# EAGLE board Mp3_Trigger_Panel_v24 (EAGLE 7.4.0), part 1 of 4
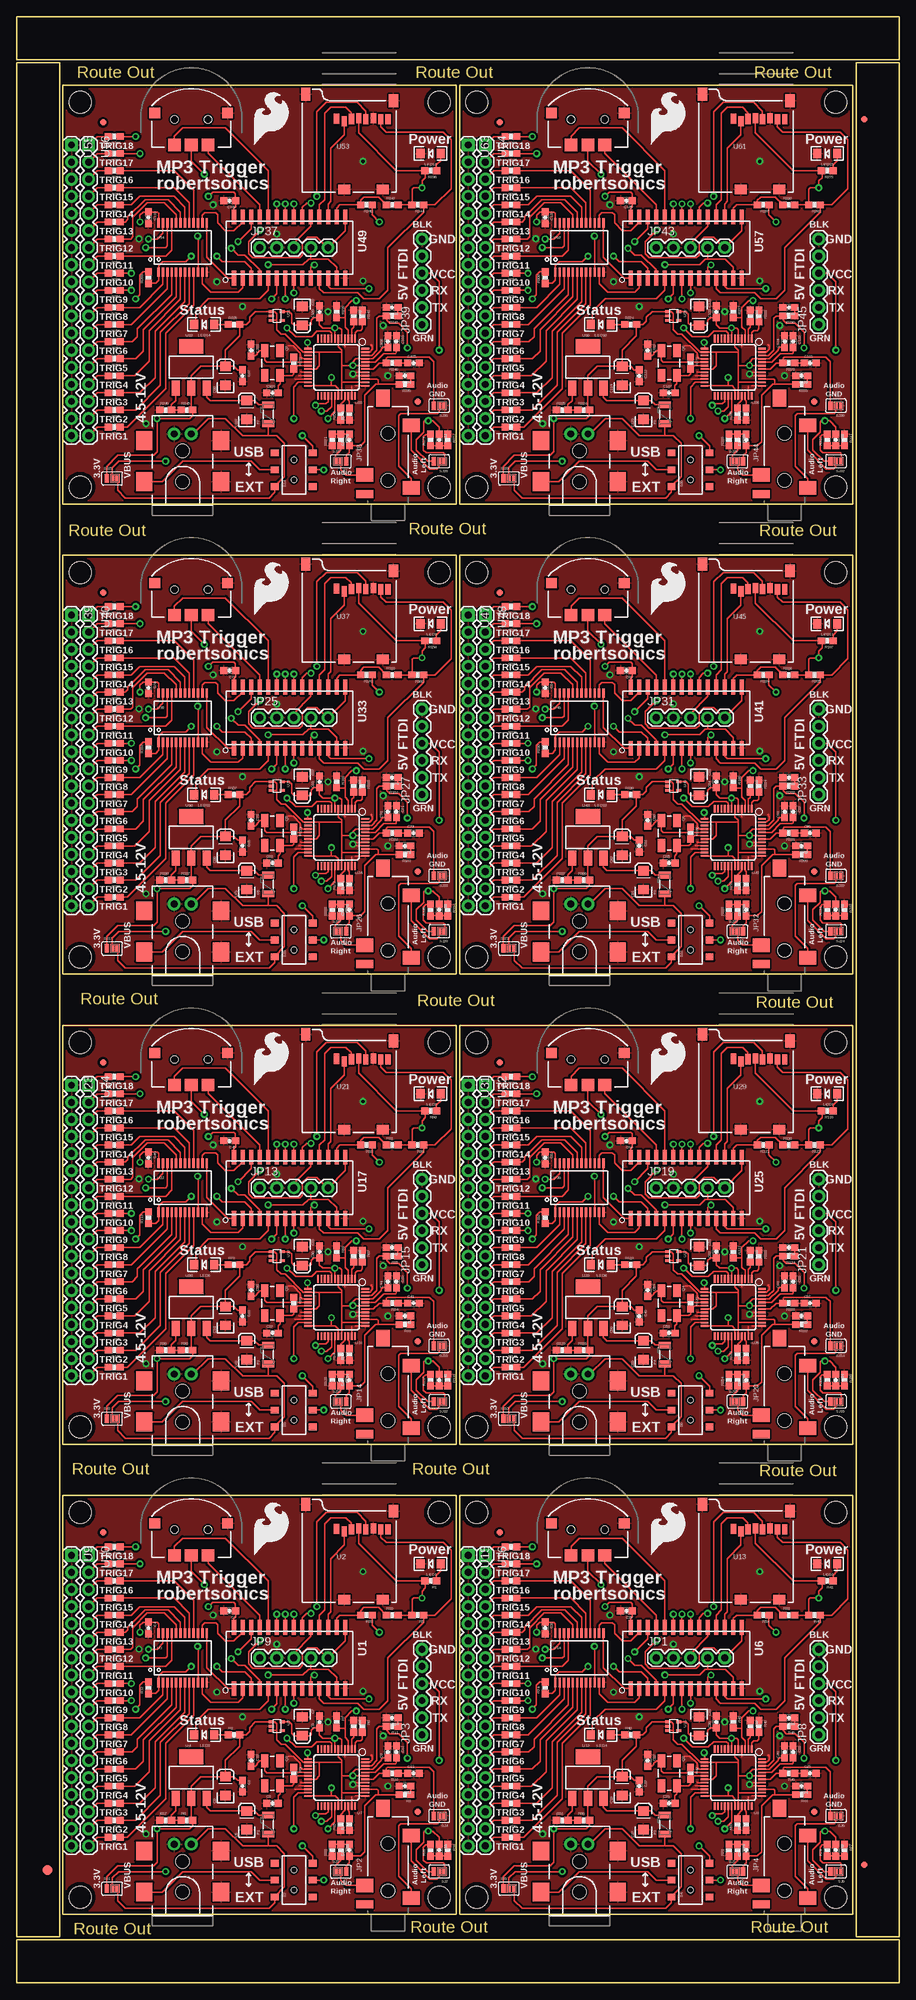
[diagram p0: board, top side]
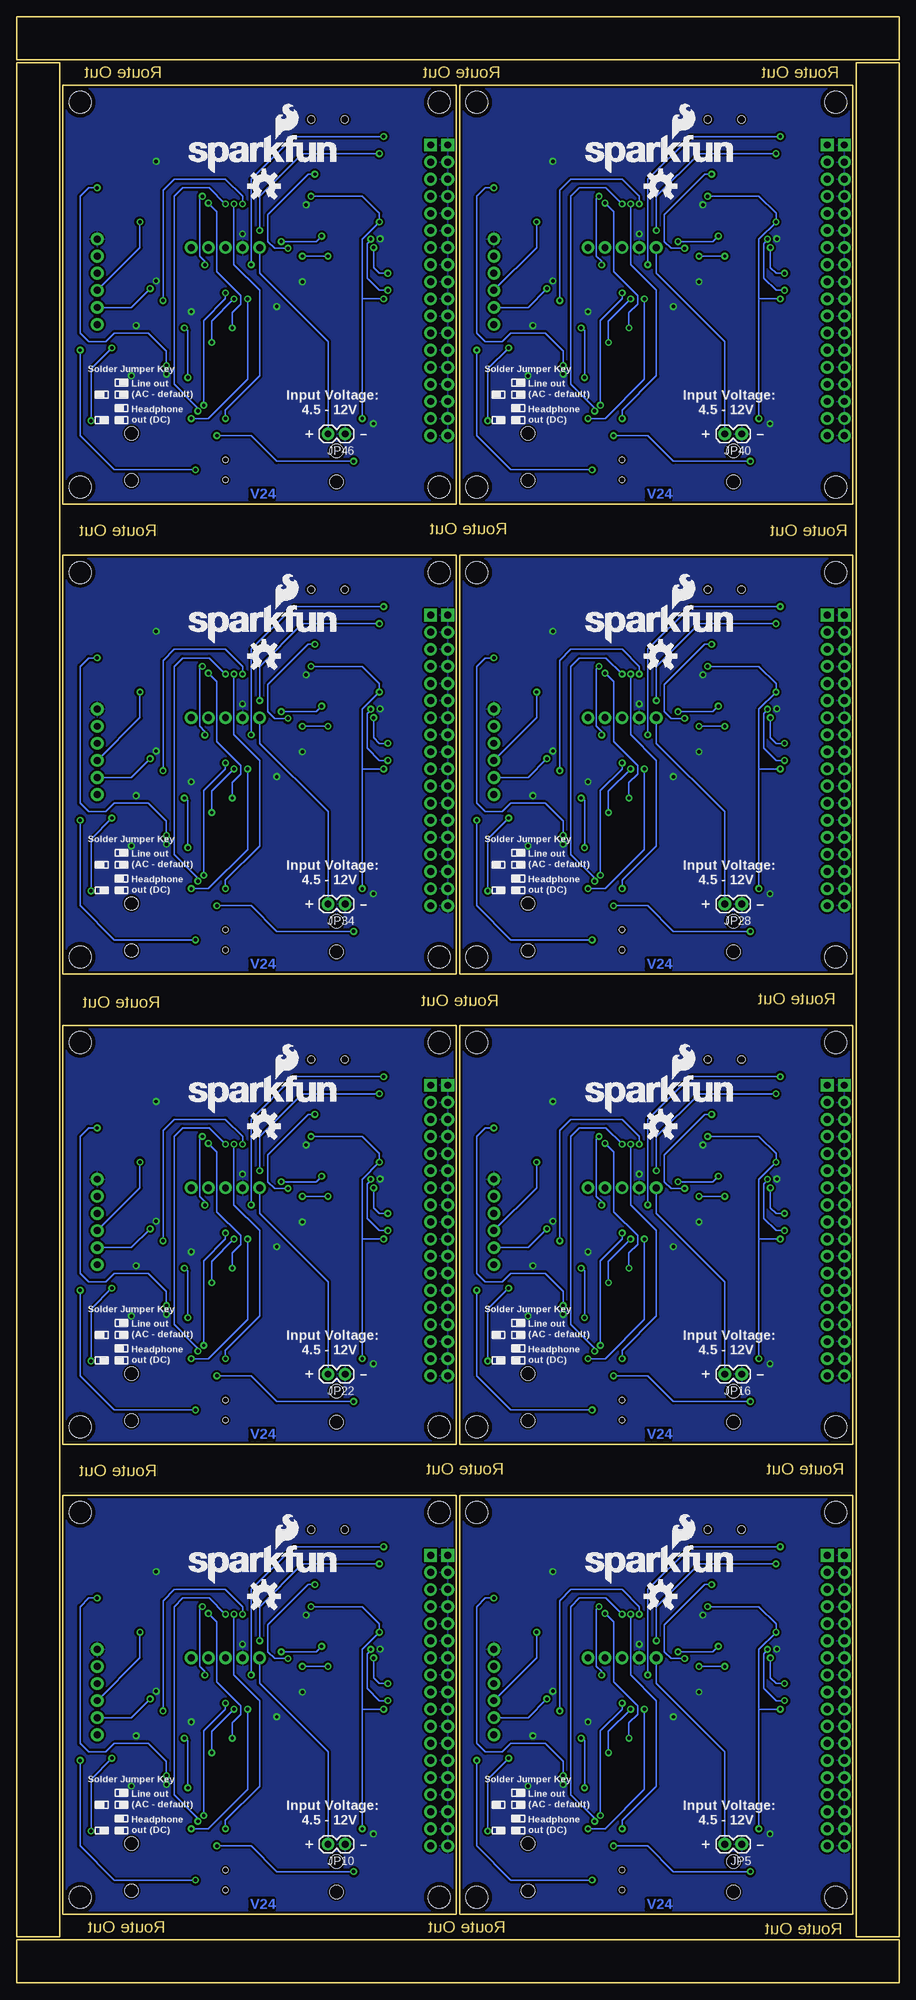
[diagram p1: board, bottom side, seen from below]

Size 131.06 x 292.1 mm. Coordinates in mm from the lower left corner, seen from the top.
Outline: 56 segments
Copper layers (1*16): Top 0.035mm / dielectric 1.5mm / Bottom 0.035mm
Design rules "SparkFun-2-layer": minimum track width 7mil, minimum drill 15mil, track to track 8mil, track to pad 8mil, pad to pad 8mil, via to via 8mil, smd to smd 8mil, copper to edge 8mil, drill to drill 8mil, minimum pad ring 12mil, minimum via ring 10mil, stop-mask expansion 4mil, vias tented up to drill 20mil, thermal gap 10mil
Net classes: 1 +5v: width 0.813 mm; 2 GND: width 0.813 mm

## Footprints (pad centres in the part's own frame; a part is rotated, then mirrored left to right if it is on the bottom)
0603-CAP = smd 1.1 x 1: 1 -0.85,0; 2 0.85,0
EIA3216 = smd 1.4 x 1.6: A 1.4,0; C -1.4,0
FIDUCIAL-1.5X3 = smd 1.5 x 1.5: 1 0,0
FIDUCIAL-1X2 = smd 1 x 1: 1 0,0
PTC-1206 = smd 1 x 1.8: 1 -1.4,0; 2 1.4,0
POWER_JACK_SMD_OVERPASTE_TOE = smd 2.8 x 2.4: GND 0,-5.7; P$4 6.1,-5.7; VIN0 0,5.7; VIN1 6.1,5.7 | hole 2.032: 0,0; 4.572,0
1X05 = drill 1.016 pad 1.88: 1 0,0; 2 2.54,0; 3 5.08,0; 4 7.62,0; 5 10.16,0
AUDIO-JACK-3.5MM-SMD = smd 2 x 2.5: RING 4.3,3.45; SLEEVE 2.4,-3.45; TIP 11.7,-3.45 | smd 1.2 x 2.5: RSH 1.5,3.45 | smd 2.5 x 2: TSH 15.75,0.75 | hole 2: 3.5,0; 10.5,0
1X06 = drill 1.016 pad 1.88: 1 0,0; 2 2.54,0; 3 5.08,0; 4 7.62,0; 5 10.16,0; 6 12.7,0
1X02 = drill 1.016 pad 1.88: 1 0,0; 2 2.54,0
LED-1206 = smd 1.2 x 1.4: A -1.5,0; C 1.5,0
CRYSTAL-SMD-5X3 = smd 1.9 x 1.1: 1 -1.85,-1.15; 2 1.85,-1.15; 3 1.85,1.15; 4 -1.85,1.15
0603-RES = smd 1.1 x 1: 1 -0.85,0; 2 0.85,0
NAV_SWITCH = smd 1.9 x 1.8: 1 -2.5,-3.8; 2 2.5,-3.8; T 0,-3.8 | smd 1.6 x 1.5: C 5.4,0.95; NC -5.4,0.95 | hole 1.1: -2.5,0; 2.5,0
AYZ0202 = smd 1 x 1.15: 1 -2.5,2.825; 2 0,2.825; 3 2.5,2.825; 4 -2.5,-2.825; 5 0,-2.825; 6 2.5,-2.825 | hole 0.85: 1.5,0; -1.5,0
PAD-JUMPER-3-2OF3_NC_BY_PASTE_YES_SILK_FULL_BOX = smd 0.635 x 1.27: 1 -0.813,0; 2 0,0; 3 0.813,0
PAD-HUMPER-3-1&2_NC_BY_PASTE_YES_SILK_FULL_BOX = smd 0.635 x 1.27: 1 -0.813,0; 2 0,0; 3 0.813,0
SOIC-28 = smd 0.6 x 2.2: 1 8.89,4.548; 2 7.62,4.548; 3 6.35,4.548; 4 5.08,4.548; 5 3.81,4.548; 6 2.54,4.548; 7 1.27,4.548; 8 0,4.548; 9 -1.27,4.548; 10 -2.54,4.548; 11 -3.81,4.548; 12 -5.08,4.548; 13 -6.35,4.548; 14 -7.62,4.548; 15 -7.62,-4.548; 16 -6.35,-4.548; 17 -5.08,-4.548; 18 -3.81,-4.548; 19 -2.54,-4.548; 20 -1.27,-4.548; 21 0,-4.548; 22 1.27,-4.548; 23 2.54,-4.548; 24 3.81,-4.548; 25 5.08,-4.548; 26 6.35,-4.548; 27 7.62,-4.548; 28 8.89,-4.548
MICROSD_1:1 = smd 0.8 x 1.5: 1 5.096,10.919; 2 6.218,10.519; 3 7.274,10.853; 4 8.367,10.982; 5 9.421,10.828; 6 10.539,10.973; 7 11.648,10.819; 8 12.721,10.819 | smd 1.8 x 1.4: CD1 11.92,0.4; CD2 6.22,0.4 | smd 1.4 x 1.9: GND1 0.497,14.55; GND3 13.52,13.55
SSOP24 = smd 0.348 x 1.397: 1 -3.575,-3.656; 2 -2.925,-3.656; 3 -2.275,-3.656; 4 -1.625,-3.656; 5 -0.975,-3.656; 6 -0.325,-3.656; 7 0.325,-3.656; 8 0.975,-3.656; 9 1.625,-3.656; 10 2.275,-3.656; 11 2.925,-3.656; 12 3.575,-3.656; 13 3.575,3.656; 14 2.925,3.656; 15 2.275,3.656; 16 1.625,3.656; 17 0.975,3.656; 18 0.325,3.656; 19 -0.325,3.656; 20 -0.975,3.656; 21 -1.625,3.656; 22 -2.275,3.656; 23 -2.925,3.656; 24 -3.575,3.656
SOT223 = smd 1.219 x 2.235: 1 -2.311,-3.099; 2 0,-3.099; 3 2.311,-3.099 | smd 3.6 x 2.2: 4 0,3.099
SC70 = smd 0.4 x 0.75: 1 -0.65,-0.825; 2 0,-0.825; 3 0.65,-0.825; 4 0.65,0.825; 5 -0.65,0.825
LQFP-48 = smd 0.254 x 1.143: 1 -2.75,-4.25; 2 -2.25,-4.25; 3 -1.75,-4.25; 4 -1.25,-4.25; 5 -0.75,-4.25; 6 -0.25,-4.25; 7 0.25,-4.25; 8 0.75,-4.25; 9 1.25,-4.25; 10 1.75,-4.25; 11 2.25,-4.25; 12 2.75,-4.25; 25 2.75,4.25; 26 2.25,4.25; 27 1.75,4.25; 28 1.25,4.25; 29 0.75,4.25; 30 0.25,4.25; 31 -0.25,4.25; 32 -0.75,4.25; 33 -1.25,4.25; 34 -1.75,4.25; 35 -2.25,4.25; 36 -2.75,4.25 | smd 1.143 x 0.254: 13 4.25,-2.75; 14 4.25,-2.25; 15 4.25,-1.75; 16 4.25,-1.25; 17 4.25,-0.75; 18 4.25,-0.25; 19 4.25,0.25; 20 4.25,0.75; 21 4.25,1.25; 22 4.25,1.75; 23 4.25,2.25; 24 4.25,2.75; 37 -4.25,2.75; 38 -4.25,2.25; 39 -4.25,1.75; 40 -4.25,1.25; 41 -4.25,0.75; 42 -4.25,0.25; 43 -4.25,-0.25; 44 -4.25,-0.75; 45 -4.25,-1.25; 46 -4.25,-1.75; 47 -4.25,-2.25; 48 -4.25,-2.75
1X18 = drill 1.016 pad 1.88 square: 1 0,0 | drill 1.016 pad 1.88: 2 2.54,0; 3 5.08,0; 4 7.62,0; 5 10.16,0; 6 12.7,0; 7 15.24,0; 8 17.78,0; 9 20.32,0; 10 22.86,0; 11 25.4,0; 12 27.94,0; 13 30.48,0; 14 33.02,0; 15 35.56,0; 16 38.1,0; 17 40.64,0; 18 43.18,0
STAND-OFF = hole 3.302: 0,0

## Placement (x,y rotation side)
C1  0.1uF  [0603-CAP]  31.62,55.24 180 top
C2  0.1uF  [0603-CAP]  33.53,29.21 270 top
C3  10uF  [EIA3216]  30.99,29.21 90 top
C4  0.1uF  [0603-CAP]  19.56,52.7 270 top
C5  10uF  [EIA3216]  34.16,24.13 90 top
C6  0.1uF  [0603-CAP]  55.12,34.29 90 top
C7  10uF  [EIA3216]  42.42,38.1 270 top
C8  0.1uF  [0603-CAP]  44.96,38.73 90 top
C9  22pF  [0603-CAP]  37.97,26.67 0 top
C10  22pF  [0603-CAP]  34.8,33.02 270 top
C11  0.1uF  [0603-CAP]  56.39,34.29 270 top
C12  10nF  [0603-CAP]  57.66,29.21 180 top
C13  47nF  [0603-CAP]  58.93,31.11 0 top
C14  10nF  [0603-CAP]  55.75,39.37 180 top
C15  10uF  [0603-CAP]  49.4,19.68 90 top
C16  10uF  [0603-CAP]  62.74,19.68 270 top
C17  0.1uF  [0603-CAP]  92.46,29.21 270 top
C18  10uF  [EIA3216]  89.92,29.21 90 top
C19  10uF  [EIA3216]  101.35,38.1 270 top
C20  0.1uF  [0603-CAP]  103.89,38.73 90 top
C21  22pF  [0603-CAP]  96.9,26.67 0 top
C22  22pF  [0603-CAP]  93.73,33.02 270 top
C23  0.1uF  [0603-CAP]  115.32,34.29 270 top
C24  10nF  [0603-CAP]  116.59,29.21 180 top
C25  47nF  [0603-CAP]  117.86,31.11 0 top
C26  10nF  [0603-CAP]  114.68,39.37 180 top
C27  10uF  [EIA3216]  93.09,24.13 90 top
C28  0.1uF  [0603-CAP]  114.05,34.29 90 top
C29  0.1uF  [0603-CAP]  90.55,55.24 180 top
C30  0.1uF  [0603-CAP]  78.49,52.7 270 top
C31  10uF  [0603-CAP]  108.33,19.68 90 top
C32  10uF  [0603-CAP]  121.67,19.68 270 top
C33  0.1uF  [0603-CAP]  33.53,99.06 270 top
C34  10uF  [EIA3216]  30.99,99.06 90 top
C35  10uF  [EIA3216]  42.42,107.95 270 top
C36  0.1uF  [0603-CAP]  44.96,108.58 90 top
C37  22pF  [0603-CAP]  37.97,96.52 0 top
C38  22pF  [0603-CAP]  34.8,102.87 270 top
C39  0.1uF  [0603-CAP]  56.39,104.14 270 top
C40  10nF  [0603-CAP]  57.66,99.06 180 top
C41  47nF  [0603-CAP]  58.93,100.97 0 top
C42  10nF  [0603-CAP]  55.75,109.22 180 top
C43  10uF  [EIA3216]  34.16,93.98 90 top
C44  0.1uF  [0603-CAP]  55.12,104.14 90 top
C45  0.1uF  [0603-CAP]  31.62,125.09 180 top
C46  0.1uF  [0603-CAP]  19.56,122.56 270 top
C47  10uF  [0603-CAP]  49.4,89.53 90 top
C48  10uF  [0603-CAP]  62.74,89.53 270 top
C49  0.1uF  [0603-CAP]  92.46,99.06 270 top
C50  10uF  [EIA3216]  89.92,99.06 90 top
C51  10uF  [EIA3216]  101.35,107.95 270 top
C52  0.1uF  [0603-CAP]  103.89,108.58 90 top
C53  22pF  [0603-CAP]  96.9,96.52 0 top
C54  22pF  [0603-CAP]  93.73,102.87 270 top
C55  0.1uF  [0603-CAP]  115.32,104.14 270 top
C56  10nF  [0603-CAP]  116.59,99.06 180 top
C57  47nF  [0603-CAP]  117.86,100.97 0 top
C58  10nF  [0603-CAP]  114.68,109.22 180 top
C59  10uF  [EIA3216]  93.09,93.98 90 top
C60  0.1uF  [0603-CAP]  114.05,104.14 90 top
C61  0.1uF  [0603-CAP]  90.55,125.09 180 top
C62  0.1uF  [0603-CAP]  78.49,122.56 270 top
C63  10uF  [0603-CAP]  108.33,89.53 90 top
C64  10uF  [0603-CAP]  121.67,89.53 270 top
C65  0.1uF  [0603-CAP]  33.53,168.91 270 top
C66  10uF  [EIA3216]  30.99,168.91 90 top
C67  10uF  [EIA3216]  42.42,177.8 270 top
C68  0.1uF  [0603-CAP]  44.96,178.44 90 top
C69  22pF  [0603-CAP]  37.97,166.37 0 top
C70  22pF  [0603-CAP]  34.8,172.72 270 top
C71  0.1uF  [0603-CAP]  56.39,173.99 270 top
C72  10nF  [0603-CAP]  57.66,168.91 180 top
C73  47nF  [0603-CAP]  58.93,170.81 0 top
C74  10nF  [0603-CAP]  55.75,179.07 180 top
C75  10uF  [EIA3216]  34.16,163.83 90 top
C76  0.1uF  [0603-CAP]  55.12,173.99 90 top
C77  0.1uF  [0603-CAP]  31.62,194.94 180 top
C78  0.1uF  [0603-CAP]  19.56,192.41 270 top
C79  10uF  [0603-CAP]  49.4,159.38 90 top
C80  10uF  [0603-CAP]  62.74,159.38 270 top
C81  0.1uF  [0603-CAP]  92.46,168.91 270 top
C82  10uF  [EIA3216]  89.92,168.91 90 top
C83  10uF  [EIA3216]  101.35,177.8 270 top
C84  0.1uF  [0603-CAP]  103.89,178.44 90 top
C85  22pF  [0603-CAP]  96.9,166.37 0 top
C86  22pF  [0603-CAP]  93.73,172.72 270 top
C87  0.1uF  [0603-CAP]  115.32,173.99 270 top
C88  10nF  [0603-CAP]  116.59,168.91 180 top
C89  47nF  [0603-CAP]  117.86,170.81 0 top
C90  10nF  [0603-CAP]  114.68,179.07 180 top
C91  10uF  [EIA3216]  93.09,163.83 90 top
C92  0.1uF  [0603-CAP]  114.05,173.99 90 top
C93  0.1uF  [0603-CAP]  90.55,194.94 180 top
C94  0.1uF  [0603-CAP]  78.49,192.41 270 top
C95  10uF  [0603-CAP]  108.33,159.38 90 top
C96  10uF  [0603-CAP]  121.67,159.38 270 top
C97  0.1uF  [0603-CAP]  33.53,238.76 270 top
C98  10uF  [EIA3216]  30.99,238.76 90 top
C99  10uF  [EIA3216]  42.42,247.65 270 top
C100  0.1uF  [0603-CAP]  44.96,248.28 90 top
C101  22pF  [0603-CAP]  37.97,236.22 0 top
C102  22pF  [0603-CAP]  34.8,242.57 270 top
C103  0.1uF  [0603-CAP]  56.39,243.84 270 top
C104  10nF  [0603-CAP]  57.66,238.76 180 top
C105  47nF  [0603-CAP]  58.93,240.66 0 top
C106  10nF  [0603-CAP]  55.75,248.92 180 top
C107  10uF  [EIA3216]  34.16,233.68 90 top
C108  0.1uF  [0603-CAP]  55.12,243.84 90 top
C109  0.1uF  [0603-CAP]  31.62,264.8 180 top
C110  0.1uF  [0603-CAP]  19.56,262.25 270 top
C111  10uF  [0603-CAP]  49.4,229.24 90 top
C112  10uF  [0603-CAP]  62.74,229.24 270 top
C113  0.1uF  [0603-CAP]  92.46,238.76 270 top
C114  10uF  [EIA3216]  89.92,238.76 90 top
C115  10uF  [EIA3216]  101.35,247.65 270 top
C116  0.1uF  [0603-CAP]  103.89,248.28 90 top
C117  22pF  [0603-CAP]  96.9,236.22 0 top
C118  22pF  [0603-CAP]  93.73,242.57 270 top
C119  0.1uF  [0603-CAP]  115.32,243.84 270 top
C120  10nF  [0603-CAP]  116.59,238.76 180 top
C121  47nF  [0603-CAP]  117.86,240.66 0 top
C122  10nF  [0603-CAP]  114.68,248.92 180 top
C123  10uF  [EIA3216]  93.09,233.68 90 top
C124  0.1uF  [0603-CAP]  114.05,243.84 90 top
C125  0.1uF  [0603-CAP]  90.55,264.8 180 top
C126  0.1uF  [0603-CAP]  78.49,262.25 270 top
C127  10uF  [0603-CAP]  108.33,229.24 90 top
C128  10uF  [0603-CAP]  121.67,229.24 270 top
E$1  [FIDUCIAL-1.5X3]  4.57,16.76 0 top
E$5  [FIDUCIAL-1X2]  125.86,17.53 0 top
E$6  [FIDUCIAL-1X2]  125.86,276.86 180 top
F1  PTC  [PTC-1206]  37.34,23.5 90 top
F2  PTC  [PTC-1206]  96.27,23.5 90 top
F3  PTC  [PTC-1206]  37.34,93.34 90 top
F4  PTC  [PTC-1206]  96.27,93.34 90 top
F5  PTC  [PTC-1206]  37.34,163.19 90 top
F6  PTC  [PTC-1206]  96.27,163.19 90 top
F7  PTC  [PTC-1206]  37.34,233.04 90 top
F8  PTC  [PTC-1206]  96.27,233.04 90 top
J1  POWER_JACKTOE  [POWER_JACK_SMD_OVERPASTE_TOE]  24.64,13.46 90 top
J2  POWER_JACKTOE  [POWER_JACK_SMD_OVERPASTE_TOE]  83.57,13.46 90 top
J3  POWER_JACKTOE  [POWER_JACK_SMD_OVERPASTE_TOE]  24.64,83.31 90 top
J4  POWER_JACKTOE  [POWER_JACK_SMD_OVERPASTE_TOE]  83.57,83.31 90 top
J5  POWER_JACKTOE  [POWER_JACK_SMD_OVERPASTE_TOE]  24.64,153.16 90 top
J6  POWER_JACKTOE  [POWER_JACK_SMD_OVERPASTE_TOE]  83.57,153.16 90 top
J7  POWER_JACKTOE  [POWER_JACK_SMD_OVERPASTE_TOE]  24.64,223.01 90 top
J8  POWER_JACKTOE  [POWER_JACK_SMD_OVERPASTE_TOE]  83.57,223.01 90 top
JP1  ISSP  [1X05]  95,48.26 0 top
JP2  AUDIO-JACK  [AUDIO-JACK-3.5MM-SMD]  55.12,10.16 90 top
JP3  FTDI Basic  [1X06]  60.2,36.83 90 top
JP4  AUDIO-JACK  [AUDIO-JACK-3.5MM-SMD]  114.05,10.16 90 top
JP5  TestPoints  [1X02]  23.37,20.57 180 bottom
JP6  FIDUCIAL1X2  [FIDUCIAL-1X2]  12.8,66.88 0 top
JP7  FIDUCIAL1X2  [FIDUCIAL-1X2]  59.56,25.4 0 top
JP8  FTDI Basic  [1X06]  119.13,36.83 90 top
JP9  ISSP  [1X05]  36.07,48.26 0 top
JP10  TestPoints  [1X02]  82.3,20.57 180 bottom
JP11  FIDUCIAL1X2  [FIDUCIAL-1X2]  71.73,66.88 0 top
JP12  FIDUCIAL1X2  [FIDUCIAL-1X2]  118.49,25.4 0 top
JP13  ISSP  [1X05]  36.07,118.11 0 top
JP14  AUDIO-JACK  [AUDIO-JACK-3.5MM-SMD]  55.12,80.01 90 top
JP15  FTDI Basic  [1X06]  60.2,106.68 90 top
JP16  TestPoints  [1X02]  23.37,90.42 180 bottom
JP17  FIDUCIAL1X2  [FIDUCIAL-1X2]  12.8,136.73 0 top
JP18  FIDUCIAL1X2  [FIDUCIAL-1X2]  59.56,95.25 0 top
JP19  ISSP  [1X05]  95,118.11 0 top
JP20  AUDIO-JACK  [AUDIO-JACK-3.5MM-SMD]  114.05,80.01 90 top
JP21  FTDI Basic  [1X06]  119.13,106.68 90 top
JP22  TestPoints  [1X02]  82.3,90.42 180 bottom
JP23  FIDUCIAL1X2  [FIDUCIAL-1X2]  71.73,136.73 0 top
JP24  FIDUCIAL1X2  [FIDUCIAL-1X2]  118.49,95.25 0 top
JP25  ISSP  [1X05]  36.07,187.96 0 top
JP26  AUDIO-JACK  [AUDIO-JACK-3.5MM-SMD]  55.12,149.86 90 top
JP27  FTDI Basic  [1X06]  60.2,176.53 90 top
JP28  TestPoints  [1X02]  23.37,160.27 180 bottom
JP29  FIDUCIAL1X2  [FIDUCIAL-1X2]  12.8,206.58 0 top
JP30  FIDUCIAL1X2  [FIDUCIAL-1X2]  59.56,165.1 0 top
JP31  ISSP  [1X05]  95,187.96 0 top
JP32  AUDIO-JACK  [AUDIO-JACK-3.5MM-SMD]  114.05,149.86 90 top
JP33  FTDI Basic  [1X06]  119.13,176.53 90 top
JP34  TestPoints  [1X02]  82.3,160.27 180 bottom
JP35  FIDUCIAL1X2  [FIDUCIAL-1X2]  71.73,206.58 0 top
JP36  FIDUCIAL1X2  [FIDUCIAL-1X2]  118.49,165.1 0 top
JP37  ISSP  [1X05]  36.07,257.81 0 top
JP38  AUDIO-JACK  [AUDIO-JACK-3.5MM-SMD]  55.12,219.71 90 top
JP39  FTDI Basic  [1X06]  60.2,246.38 90 top
JP40  TestPoints  [1X02]  23.37,230.12 180 bottom
JP41  FIDUCIAL1X2  [FIDUCIAL-1X2]  12.8,276.43 0 top
JP42  FIDUCIAL1X2  [FIDUCIAL-1X2]  59.56,234.95 0 top
JP43  ISSP  [1X05]  95,257.81 0 top
JP44  AUDIO-JACK  [AUDIO-JACK-3.5MM-SMD]  114.05,219.71 90 top
JP45  FTDI Basic  [1X06]  119.13,246.38 90 top
JP46  TestPoints  [1X02]  82.3,230.12 180 bottom
JP47  FIDUCIAL1X2  [FIDUCIAL-1X2]  71.73,276.43 0 top
JP48  FIDUCIAL1X2  [FIDUCIAL-1X2]  118.49,234.95 0 top
LED1  RED  [LED-1206]  61.47,62.23 180 top
LED2  GREEN  [LED-1206]  27.81,36.83 180 top
LED3  RED  [LED-1206]  120.4,62.23 180 top
LED4  GREEN  [LED-1206]  86.74,36.83 180 top
LED5  RED  [LED-1206]  61.47,132.08 180 top
LED6  GREEN  [LED-1206]  27.81,106.68 180 top
LED7  RED  [LED-1206]  120.4,132.08 180 top
LED8  GREEN  [LED-1206]  86.74,106.68 180 top
LED9  RED  [LED-1206]  61.47,201.93 180 top
LED10  GREEN  [LED-1206]  27.81,176.53 180 top
LED11  RED  [LED-1206]  120.4,201.93 180 top
LED12  GREEN  [LED-1206]  86.74,176.53 180 top
LED13  RED  [LED-1206]  61.47,271.78 180 top
LED14  GREEN  [LED-1206]  27.81,246.38 180 top
LED15  RED  [LED-1206]  120.4,271.78 180 top
LED16  GREEN  [LED-1206]  86.74,246.38 180 top
LOGO1  SFE_LOGO_FLAME.3_INCH  [SFE_LOGO_FLAME_.3]  34.8,63.5 0 top
LOGO2  SFE_LOGO_FLAME.3_INCH  [SFE_LOGO_FLAME_.3]  93.73,63.5 0 top
LOGO3  OSHW-LOGOM  [OSHW-LOGO-M]  35.43,57.4 0 bottom
LOGO4  OSHW-LOGOM  [OSHW-LOGO-M]  94.36,57.4 0 bottom
LOGO5  SFE_LOGO_FLAME.3_INCH  [SFE_LOGO_FLAME_.3]  34.8,133.35 0 top
LOGO6  OSHW-LOGOM  [OSHW-LOGO-M]  35.43,127.25 0 bottom
LOGO7  SFE_LOGO_FLAME.3_INCH  [SFE_LOGO_FLAME_.3]  93.73,133.35 0 top
LOGO8  OSHW-LOGOM  [OSHW-LOGO-M]  94.36,127.25 0 bottom
LOGO9  SFE_LOGO_FLAME.3_INCH  [SFE_LOGO_FLAME_.3]  34.8,203.2 0 top
LOGO10  OSHW-LOGOM  [OSHW-LOGO-M]  35.43,197.1 0 bottom
LOGO11  SFE_LOGO_FLAME.3_INCH  [SFE_LOGO_FLAME_.3]  93.73,203.2 0 top
LOGO12  OSHW-LOGOM  [OSHW-LOGO-M]  94.36,197.1 0 bottom
LOGO13  SFE_LOGO_FLAME.3_INCH  [SFE_LOGO_FLAME_.3]  34.8,273.05 0 top
LOGO14  OSHW-LOGOM  [OSHW-LOGO-M]  35.43,266.95 0 bottom
LOGO15  SFE_LOGO_FLAME.3_INCH  [SFE_LOGO_FLAME_.3]  93.73,273.05 0 top
LOGO16  OSHW-LOGOM  [OSHW-LOGO-M]  94.36,266.95 0 bottom
Q1  12.288MHz  [CRYSTAL-SMD-5X3]  37.97,31.11 270 top
Q2  12.288MHz  [CRYSTAL-SMD-5X3]  96.9,31.11 270 top
Q3  12.288MHz  [CRYSTAL-SMD-5X3]  37.97,100.97 270 top
Q4  12.288MHz  [CRYSTAL-SMD-5X3]  96.9,100.97 270 top
Q5  12.288MHz  [CRYSTAL-SMD-5X3]  37.97,170.81 270 top
Q6  12.288MHz  [CRYSTAL-SMD-5X3]  96.9,170.81 270 top
Q7  12.288MHz  [CRYSTAL-SMD-5X3]  37.97,240.66 270 top
Q8  12.288MHz  [CRYSTAL-SMD-5X3]  96.9,240.66 270 top
R1  1K  [0603-RES]  61.47,59.69 180 top
R2  330  [0603-RES]  32.26,36.83 0 top
R3  1M  [0603-RES]  41.15,31.11 270 top
R4  100k  [0603-RES]  50.04,38.1 270 top
R5  47K  [0603-RES]  59.56,54.61 180 top
R6  240  [0603-RES]  25.27,24.13 0 top
R7  100k  [0603-RES]  47.5,38.73 270 top
R8  100k  [0603-RES]  51.31,38.1 270 top
R9  20  [0603-RES]  57.66,27.94 180 top
R10  20  [0603-RES]  55.75,31.11 180 top
R11  20  [0603-RES]  55.75,38.1 180 top
R12  1K  [0603-RES]  19.56,43.81 90 top
R13  100/.25W  [0603-RES]  48.13,19.68 270 top
R14  100k  [0603-RES]  49.4,23.5 90 top
R15  100k  [0603-RES]  48.13,23.5 90 top
R16  10K  [0603-RES]  46.86,19.68 90 top
R17  390  [0603-RES]  22.1,24.13 0 top
R18  10K  [0603-RES]  64.01,19.68 270 top
R19  10K  [0603-RES]  55.75,54.61 0 top
R20  100  [0603-RES]  51.94,54.61 180 top
R21  100  [0603-RES]  14.48,26.67 180 top
R22  100  [0603-RES]  14.48,29.21 180 top
R23  100  [0603-RES]  14.48,31.75 180 top
R24  100  [0603-RES]  14.48,34.29 180 top
R25  100  [0603-RES]  14.48,36.83 180 top
R26  100  [0603-RES]  14.48,39.37 180 top
R27  100  [0603-RES]  14.48,41.91 180 top
R28  100  [0603-RES]  14.48,44.45 180 top
R29  100  [0603-RES]  14.48,46.99 180 top
R30  100  [0603-RES]  14.48,49.53 180 top
R31  100  [0603-RES]  14.48,52.07 180 top
R32  100  [0603-RES]  14.48,54.61 180 top
R33  100  [0603-RES]  14.48,57.15 180 top
R34  100  [0603-RES]  14.48,59.69 180 top
R35  100  [0603-RES]  14.48,24.13 180 top
R36  100  [0603-RES]  14.48,21.59 180 top
R37  100  [0603-RES]  14.48,62.23 180 top
R38  100  [0603-RES]  14.48,64.77 180 top
R39  100/.25W  [0603-RES]  61.47,19.68 90 top
R40  330  [0603-RES]  91.19,36.83 0 top
R41  1K  [0603-RES]  120.4,59.69 180 top
R42  1M  [0603-RES]  100.08,31.11 270 top
R43  100k  [0603-RES]  106.43,38.73 270 top
R44  20  [0603-RES]  116.59,27.94 180 top
R45  20  [0603-RES]  114.68,31.11 180 top
R46  20  [0603-RES]  114.68,38.1 180 top
R47  100k  [0603-RES]  108.97,38.1 270 top
R48  100k  [0603-RES]  110.24,38.1 270 top
R49  47K  [0603-RES]  118.49,54.61 180 top
R50  240  [0603-RES]  84.2,24.13 0 top
R51  390  [0603-RES]  81.03,24.13 0 top
R52  10K  [0603-RES]  114.68,54.61 0 top
R53  100  [0603-RES]  110.87,54.61 180 top
R54  100k  [0603-RES]  108.33,23.5 90 top
R55  100k  [0603-RES]  107.06,23.5 90 top
R56  100  [0603-RES]  73.41,26.67 180 top
R57  100  [0603-RES]  73.41,29.21 180 top
R58  100  [0603-RES]  73.41,31.75 180 top
R59  100  [0603-RES]  73.41,34.29 180 top
R60  100  [0603-RES]  73.41,36.83 180 top
R61  100  [0603-RES]  73.41,39.37 180 top
R62  100  [0603-RES]  73.41,41.91 180 top
R63  100  [0603-RES]  73.41,44.45 180 top
R64  100  [0603-RES]  73.41,46.99 180 top
R65  100  [0603-RES]  73.41,49.53 180 top
R66  100  [0603-RES]  73.41,52.07 180 top
R67  100  [0603-RES]  73.41,54.61 180 top
R68  100  [0603-RES]  73.41,57.15 180 top
R69  100  [0603-RES]  73.41,59.69 180 top
R70  100  [0603-RES]  73.41,24.13 180 top
R71  100  [0603-RES]  73.41,21.59 180 top
R72  100  [0603-RES]  73.41,62.23 180 top
R73  100  [0603-RES]  73.41,64.77 180 top
R74  1K  [0603-RES]  78.49,43.81 90 top
R75  100/.25W  [0603-RES]  107.06,19.68 270 top
R76  10K  [0603-RES]  105.79,19.68 90 top
R77  10K  [0603-RES]  122.94,19.68 270 top
R78  100/.25W  [0603-RES]  120.4,19.68 90 top
R79  330  [0603-RES]  32.26,106.68 0 top
R80  1K  [0603-RES]  61.47,129.54 180 top
R81  1M  [0603-RES]  41.15,100.97 270 top
R82  100k  [0603-RES]  47.5,108.58 270 top
R83  20  [0603-RES]  57.66,97.79 180 top
R84  20  [0603-RES]  55.75,100.97 180 top
R85  20  [0603-RES]  55.75,107.95 180 top
R86  100k  [0603-RES]  50.04,107.95 270 top
R87  100k  [0603-RES]  51.31,107.95 270 top
R88  47K  [0603-RES]  59.56,124.46 180 top
R89  240  [0603-RES]  25.27,93.98 0 top
R90  390  [0603-RES]  22.1,93.98 0 top
R91  10K  [0603-RES]  55.75,124.46 0 top
R92  100  [0603-RES]  51.94,124.46 180 top
R93  100k  [0603-RES]  49.4,93.34 90 top
R94  100k  [0603-RES]  48.13,93.34 90 top
R95  100  [0603-RES]  14.48,96.52 180 top
R96  100  [0603-RES]  14.48,99.06 180 top
R97  100  [0603-RES]  14.48,101.6 180 top
R98  100  [0603-RES]  14.48,104.14 180 top
R99  100  [0603-RES]  14.48,106.68 180 top
R100  100  [0603-RES]  14.48,109.22 180 top
R101  100  [0603-RES]  14.48,111.76 180 top
R102  100  [0603-RES]  14.48,114.3 180 top
R103  100  [0603-RES]  14.48,116.84 180 top
R104  100  [0603-RES]  14.48,119.38 180 top
R105  100  [0603-RES]  14.48,121.92 180 top
R106  100  [0603-RES]  14.48,124.46 180 top
R107  100  [0603-RES]  14.48,127 180 top
R108  100  [0603-RES]  14.48,129.54 180 top
R109  100  [0603-RES]  14.48,93.98 180 top
R110  100  [0603-RES]  14.48,91.44 180 top
R111  100  [0603-RES]  14.48,132.08 180 top
R112  100  [0603-RES]  14.48,134.62 180 top
R113  1K  [0603-RES]  19.56,113.67 90 top
R114  100/.25W  [0603-RES]  48.13,89.53 270 top
R115  10K  [0603-RES]  46.86,89.53 90 top
R116  10K  [0603-RES]  64.01,89.53 270 top
R117  100/.25W  [0603-RES]  61.47,89.53 90 top
R118  330  [0603-RES]  91.19,106.68 0 top
R119  1K  [0603-RES]  120.4,129.54 180 top
R120  1M  [0603-RES]  100.08,100.97 270 top
R121  100k  [0603-RES]  106.43,108.58 270 top
R122  20  [0603-RES]  116.59,97.79 180 top
R123  20  [0603-RES]  114.68,100.97 180 top
R124  20  [0603-RES]  114.68,107.95 180 top
R125  100k  [0603-RES]  108.97,107.95 270 top
R126  100k  [0603-RES]  110.24,107.95 270 top
R127  47K  [0603-RES]  118.49,124.46 180 top
R128  240  [0603-RES]  84.2,93.98 0 top
R129  390  [0603-RES]  81.03,93.98 0 top
R130  10K  [0603-RES]  114.68,124.46 0 top
R131  100  [0603-RES]  110.87,124.46 180 top
R132  100k  [0603-RES]  108.33,93.34 90 top
R133  100k  [0603-RES]  107.06,93.34 90 top
R134  100  [0603-RES]  73.41,96.52 180 top
R135  100  [0603-RES]  73.41,99.06 180 top
R136  100  [0603-RES]  73.41,101.6 180 top
R137  100  [0603-RES]  73.41,104.14 180 top
R138  100  [0603-RES]  73.41,106.68 180 top
R139  100  [0603-RES]  73.41,109.22 180 top
R140  100  [0603-RES]  73.41,111.76 180 top
R141  100  [0603-RES]  73.41,114.3 180 top
R142  100  [0603-RES]  73.41,116.84 180 top
R143  100  [0603-RES]  73.41,119.38 180 top
R144  100  [0603-RES]  73.41,121.92 180 top
R145  100  [0603-RES]  73.41,124.46 180 top
R146  100  [0603-RES]  73.41,127 180 top
R147  100  [0603-RES]  73.41,129.54 180 top
R148  100  [0603-RES]  73.41,93.98 180 top
R149  100  [0603-RES]  73.41,91.44 180 top
R150  100  [0603-RES]  73.41,132.08 180 top
R151  100  [0603-RES]  73.41,134.62 180 top
R152  1K  [0603-RES]  78.49,113.67 90 top
R153  100/.25W  [0603-RES]  107.06,89.53 270 top
R154  10K  [0603-RES]  105.79,89.53 90 top
R155  10K  [0603-RES]  122.94,89.53 270 top
R156  100/.25W  [0603-RES]  120.4,89.53 90 top
R157  330  [0603-RES]  32.26,176.53 0 top
R158  1K  [0603-RES]  61.47,199.39 180 top
R159  1M  [0603-RES]  41.15,170.81 270 top
R160  100k  [0603-RES]  47.5,178.44 270 top
R161  20  [0603-RES]  57.66,167.64 180 top
R162  20  [0603-RES]  55.75,170.81 180 top
R163  20  [0603-RES]  55.75,177.8 180 top
R164  100k  [0603-RES]  50.04,177.8 270 top
R165  100k  [0603-RES]  51.31,177.8 270 top
R166  47K  [0603-RES]  59.56,194.31 180 top
R167  240  [0603-RES]  25.27,163.83 0 top
R168  390  [0603-RES]  22.1,163.83 0 top
R169  10K  [0603-RES]  55.75,194.31 0 top
R170  100  [0603-RES]  51.94,194.31 180 top
R171  100k  [0603-RES]  49.4,163.19 90 top
R172  100k  [0603-RES]  48.13,163.19 90 top
R173  100  [0603-RES]  14.48,166.37 180 top
R174  100  [0603-RES]  14.48,168.91 180 top
R175  100  [0603-RES]  14.48,171.45 180 top
R176  100  [0603-RES]  14.48,173.99 180 top
R177  100  [0603-RES]  14.48,176.53 180 top
R178  100  [0603-RES]  14.48,179.07 180 top
R179  100  [0603-RES]  14.48,181.61 180 top
R180  100  [0603-RES]  14.48,184.15 180 top
R181  100  [0603-RES]  14.48,186.69 180 top
R182  100  [0603-RES]  14.48,189.23 180 top
R183  100  [0603-RES]  14.48,191.77 180 top
R184  100  [0603-RES]  14.48,194.31 180 top
R185  100  [0603-RES]  14.48,196.85 180 top
R186  100  [0603-RES]  14.48,199.39 180 top
R187  100  [0603-RES]  14.48,163.83 180 top
R188  100  [0603-RES]  14.48,161.29 180 top
R189  100  [0603-RES]  14.48,201.93 180 top
R190  100  [0603-RES]  14.48,204.47 180 top
R191  1K  [0603-RES]  19.56,183.51 90 top
R192  100/.25W  [0603-RES]  48.13,159.38 270 top
R193  10K  [0603-RES]  46.86,159.38 90 top
R194  10K  [0603-RES]  64.01,159.38 270 top
R195  100/.25W  [0603-RES]  61.47,159.38 90 top
R196  330  [0603-RES]  91.19,176.53 0 top
R197  1K  [0603-RES]  120.4,199.39 180 top
R198  1M  [0603-RES]  100.08,170.81 270 top
R199  100k  [0603-RES]  106.43,178.44 270 top
R200  20  [0603-RES]  116.59,167.64 180 top
R201  20  [0603-RES]  114.68,170.81 180 top
R202  20  [0603-RES]  114.68,177.8 180 top
R203  100k  [0603-RES]  108.97,177.8 270 top
R204  100k  [0603-RES]  110.24,177.8 270 top
R205  47K  [0603-RES]  118.49,194.31 180 top
R206  240  [0603-RES]  84.2,163.83 0 top
R207  390  [0603-RES]  81.03,163.83 0 top
R208  10K  [0603-RES]  114.68,194.31 0 top
R209  100  [0603-RES]  110.87,194.31 180 top
R210  100k  [0603-RES]  108.33,163.19 90 top
R211  100k  [0603-RES]  107.06,163.19 90 top
R212  100  [0603-RES]  73.41,166.37 180 top
R213  100  [0603-RES]  73.41,168.91 180 top
R214  100  [0603-RES]  73.41,171.45 180 top
R215  100  [0603-RES]  73.41,173.99 180 top
R216  100  [0603-RES]  73.41,176.53 180 top
R217  100  [0603-RES]  73.41,179.07 180 top
R218  100  [0603-RES]  73.41,181.61 180 top
R219  100  [0603-RES]  73.41,184.15 180 top
R220  100  [0603-RES]  73.41,186.69 180 top
R221  100  [0603-RES]  73.41,189.23 180 top
R222  100  [0603-RES]  73.41,191.77 180 top
R223  100  [0603-RES]  73.41,194.31 180 top
R224  100  [0603-RES]  73.41,196.85 180 top
R225  100  [0603-RES]  73.41,199.39 180 top
R226  100  [0603-RES]  73.41,163.83 180 top
R227  100  [0603-RES]  73.41,161.29 180 top
R228  100  [0603-RES]  73.41,201.93 180 top
R229  100  [0603-RES]  73.41,204.47 180 top
R230  1K  [0603-RES]  78.49,183.51 90 top
R231  100/.25W  [0603-RES]  107.06,159.38 270 top
R232  10K  [0603-RES]  105.79,159.38 90 top
R233  10K  [0603-RES]  122.94,159.38 270 top
R234  100/.25W  [0603-RES]  120.4,159.38 90 top
R235  330  [0603-RES]  32.26,246.38 0 top
R236  1K  [0603-RES]  61.47,269.24 180 top
R237  1M  [0603-RES]  41.15,240.66 270 top
R238  100k  [0603-RES]  47.5,248.28 270 top
R239  20  [0603-RES]  57.66,237.49 180 top
R240  20  [0603-RES]  55.75,240.66 180 top
R241  20  [0603-RES]  55.75,247.65 180 top
R242  100k  [0603-RES]  50.04,247.65 270 top
R243  100k  [0603-RES]  51.31,247.65 270 top
R244  47K  [0603-RES]  59.56,264.16 180 top
R245  240  [0603-RES]  25.27,233.68 0 top
R246  390  [0603-RES]  22.1,233.68 0 top
R247  10K  [0603-RES]  55.75,264.16 0 top
R248  100  [0603-RES]  51.94,264.16 180 top
R249  100k  [0603-RES]  49.4,233.04 90 top
R250  100k  [0603-RES]  48.13,233.04 90 top
R251  100  [0603-RES]  14.48,236.22 180 top
R252  100  [0603-RES]  14.48,238.76 180 top
R253  100  [0603-RES]  14.48,241.3 180 top
R254  100  [0603-RES]  14.48,243.84 180 top
R255  100  [0603-RES]  14.48,246.38 180 top
R256  100  [0603-RES]  14.48,248.92 180 top
R257  100  [0603-RES]  14.48,251.46 180 top
R258  100  [0603-RES]  14.48,254 180 top
R259  100  [0603-RES]  14.48,256.54 180 top
R260  100  [0603-RES]  14.48,259.08 180 top
R261  100  [0603-RES]  14.48,261.62 180 top
R262  100  [0603-RES]  14.48,264.16 180 top
R263  100  [0603-RES]  14.48,266.7 180 top
R264  100  [0603-RES]  14.48,269.24 180 top
R265  100  [0603-RES]  14.48,233.68 180 top
R266  100  [0603-RES]  14.48,231.14 180 top
R267  100  [0603-RES]  14.48,271.78 180 top
R268  100  [0603-RES]  14.48,274.32 180 top
R269  1K  [0603-RES]  19.56,253.37 90 top
R270  100/.25W  [0603-RES]  48.13,229.24 270 top
R271  10K  [0603-RES]  46.86,229.24 90 top
R272  10K  [0603-RES]  64.01,229.24 270 top
R273  100/.25W  [0603-RES]  61.47,229.24 90 top
R274  330  [0603-RES]  91.19,246.38 0 top
R275  1K  [0603-RES]  120.4,269.24 180 top
R276  1M  [0603-RES]  100.08,240.66 270 top
R277  100k  [0603-RES]  106.43,248.28 270 top
R278  20  [0603-RES]  116.59,237.49 180 top
R279  20  [0603-RES]  114.68,240.66 180 top
R280  20  [0603-RES]  114.68,247.65 180 top
R281  100k  [0603-RES]  108.97,247.65 270 top
R282  100k  [0603-RES]  110.24,247.65 270 top
R283  47K  [0603-RES]  118.49,264.16 180 top
R284  240  [0603-RES]  84.2,233.68 0 top
R285  390  [0603-RES]  81.03,233.68 0 top
R286  10K  [0603-RES]  114.68,264.16 0 top
R287  100  [0603-RES]  110.87,264.16 180 top
R288  100k  [0603-RES]  108.33,233.04 90 top
R289  100k  [0603-RES]  107.06,233.04 90 top
R290  100  [0603-RES]  73.41,236.22 180 top
R291  100  [0603-RES]  73.41,238.76 180 top
R292  100  [0603-RES]  73.41,241.3 180 top
R293  100  [0603-RES]  73.41,243.84 180 top
R294  100  [0603-RES]  73.41,246.38 180 top
R295  100  [0603-RES]  73.41,248.92 180 top
R296  100  [0603-RES]  73.41,251.46 180 top
R297  100  [0603-RES]  73.41,254 180 top
R298  100  [0603-RES]  73.41,256.54 180 top
R299  100  [0603-RES]  73.41,259.08 180 top
R300  100  [0603-RES]  73.41,261.62 180 top
R301  100  [0603-RES]  73.41,264.16 180 top
R302  100  [0603-RES]  73.41,266.7 180 top
R303  100  [0603-RES]  73.41,269.24 180 top
R304  100  [0603-RES]  73.41,233.68 180 top
R305  100  [0603-RES]  73.41,231.14 180 top
R306  100  [0603-RES]  73.41,271.78 180 top
R307  100  [0603-RES]  73.41,274.32 180 top
R308  1K  [0603-RES]  78.49,253.37 90 top
R309  100/.25W  [0603-RES]  107.06,229.24 270 top
R310  10K  [0603-RES]  105.79,229.24 90 top
R311  10K  [0603-RES]  122.94,229.24 270 top
R312  100/.25W  [0603-RES]  120.4,229.24 90 top
S1  NAV_SWITCHSMD  [NAV_SWITCH]  25.91,67.31 0 top
S2  DPDT  [AYZ0202]  41.15,15.24 90 top
S3  NAV_SWITCHSMD  [NAV_SWITCH]  84.84,67.31 0 top
S4  DPDT  [AYZ0202]  100.08,15.24 90 top
S5  NAV_SWITCHSMD  [NAV_SWITCH]  25.91,137.16 0 top
S6  DPDT  [AYZ0202]  41.15,85.09 90 top
S7  NAV_SWITCHSMD  [NAV_SWITCH]  84.84,137.16 0 top
S8  DPDT  [AYZ0202]  100.08,85.09 90 top
S9  NAV_SWITCHSMD  [NAV_SWITCH]  25.91,207.01 0 top
S10  DPDT  [AYZ0202]  41.15,154.94 90 top
S11  NAV_SWITCHSMD  [NAV_SWITCH]  84.84,207.01 0 top
S12  DPDT  [AYZ0202]  100.08,154.94 90 top
S13  NAV_SWITCHSMD  [NAV_SWITCH]  25.91,276.86 0 top
S14  DPDT  [AYZ0202]  41.15,224.79 90 top
S15  NAV_SWITCHSMD  [NAV_SWITCH]  84.84,276.86 0 top
S16  DPDT  [AYZ0202]  100.08,224.79 90 top
SJ1  UART Power  [PAD-JUMPER-3-2OF3_NC_BY_PASTE_YES_SILK_FULL_BOX]  14.16,13.97 0 top
SJ2  AudioLeft  [PAD-HUMPER-3-1&2_NC_BY_PASTE_YES_SILK_FULL_BOX]  62.74,16.51 180 top
SJ3  AudioRight  [PAD-HUMPER-3-1&2_NC_BY_PASTE_YES_SILK_FULL_BOX]  48.13,16.51 0 top
SJ4  AudioGND  [PAD-HUMPER-3-1&2_NC_BY_PASTE_YES_SILK_FULL_BOX]  62.74,24.77 180 top
SJ5  UART Power  [PAD-JUMPER-3-2OF3_NC_BY_PASTE_YES_SILK_FULL_BOX]  73.09,13.97 0 top
SJ6  AudioGND  [PAD-HUMPER-3-1&2_NC_BY_PASTE_YES_SILK_FULL_BOX]  121.67,24.77 180 top
SJ7  AudioRight  [PAD-HUMPER-3-1&2_NC_BY_PASTE_YES_SILK_FULL_BOX]  107.06,16.51 0 top
SJ8  AudioLeft  [PAD-HUMPER-3-1&2_NC_BY_PASTE_YES_SILK_FULL_BOX]  121.67,16.51 180 top
SJ9  UART Power  [PAD-JUMPER-3-2OF3_NC_BY_PASTE_YES_SILK_FULL_BOX]  14.16,83.82 0 top
SJ10  AudioGND  [PAD-HUMPER-3-1&2_NC_BY_PASTE_YES_SILK_FULL_BOX]  62.74,94.61 180 top
SJ11  AudioRight  [PAD-HUMPER-3-1&2_NC_BY_PASTE_YES_SILK_FULL_BOX]  48.13,86.36 0 top
SJ12  AudioLeft  [PAD-HUMPER-3-1&2_NC_BY_PASTE_YES_SILK_FULL_BOX]  62.74,86.36 180 top
SJ13  UART Power  [PAD-JUMPER-3-2OF3_NC_BY_PASTE_YES_SILK_FULL_BOX]  73.09,83.82 0 top
SJ14  AudioGND  [PAD-HUMPER-3-1&2_NC_BY_PASTE_YES_SILK_FULL_BOX]  121.67,94.61 180 top
SJ15  AudioRight  [PAD-HUMPER-3-1&2_NC_BY_PASTE_YES_SILK_FULL_BOX]  107.06,86.36 0 top
SJ16  AudioLeft  [PAD-HUMPER-3-1&2_NC_BY_PASTE_YES_SILK_FULL_BOX]  121.67,86.36 180 top
SJ17  UART Power  [PAD-JUMPER-3-2OF3_NC_BY_PASTE_YES_SILK_FULL_BOX]  14.16,153.67 0 top
SJ18  AudioGND  [PAD-HUMPER-3-1&2_NC_BY_PASTE_YES_SILK_FULL_BOX]  62.74,164.47 180 top
SJ19  AudioRight  [PAD-HUMPER-3-1&2_NC_BY_PASTE_YES_SILK_FULL_BOX]  48.13,156.21 0 top
SJ20  AudioLeft  [PAD-HUMPER-3-1&2_NC_BY_PASTE_YES_SILK_FULL_BOX]  62.74,156.21 180 top
SJ21  UART Power  [PAD-JUMPER-3-2OF3_NC_BY_PASTE_YES_SILK_FULL_BOX]  73.09,153.67 0 top
SJ22  AudioGND  [PAD-HUMPER-3-1&2_NC_BY_PASTE_YES_SILK_FULL_BOX]  121.67,164.47 180 top
SJ23  AudioRight  [PAD-HUMPER-3-1&2_NC_BY_PASTE_YES_SILK_FULL_BOX]  107.06,156.21 0 top
SJ24  AudioLeft  [PAD-HUMPER-3-1&2_NC_BY_PASTE_YES_SILK_FULL_BOX]  121.67,156.21 180 top
SJ25  UART Power  [PAD-JUMPER-3-2OF3_NC_BY_PASTE_YES_SILK_FULL_BOX]  14.16,223.52 0 top
SJ26  AudioGND  [PAD-HUMPER-3-1&2_NC_BY_PASTE_YES_SILK_FULL_BOX]  62.74,234.31 180 top
SJ27  AudioRight  [PAD-HUMPER-3-1&2_NC_BY_PASTE_YES_SILK_FULL_BOX]  48.13,226.06 0 top
SJ28  AudioLeft  [PAD-HUMPER-3-1&2_NC_BY_PASTE_YES_SILK_FULL_BOX]  62.74,226.06 180 top
SJ29  UART Power  [PAD-JUMPER-3-2OF3_NC_BY_PASTE_YES_SILK_FULL_BOX]  73.09,223.52 0 top
SJ30  AudioGND  [PAD-HUMPER-3-1&2_NC_BY_PASTE_YES_SILK_FULL_BOX]  121.67,234.31 180 top
SJ31  AudioRight  [PAD-HUMPER-3-1&2_NC_BY_PASTE_YES_SILK_FULL_BOX]  107.06,226.06 0 top
SJ32  AudioLeft  [PAD-HUMPER-3-1&2_NC_BY_PASTE_YES_SILK_FULL_BOX]  121.67,226.06 180 top
U1  CY8C29466  [SOIC-28]  41.15,48.26 180 top
U2  USD-SOCKET  [MICROSD_1:1]  42.42,56.52 0 top
U3  MUX-74HC4067SMD  [SSOP24]  24.64,48.26 0 top
U4  LM1117  [SOT223]  25.91,30.48 0 top
U5  1.8V Reg  [SC70]  38.61,38.1 270 top
U6  CY8C29466  [SOIC-28]  100.08,48.26 180 top
U7  VS1063  [LQFP-48]  47.5,30.48 180 top
U8  VS1063  [LQFP-48]  106.43,30.48 180 top
U9  M18_  [1X18]  8.13,63.5 270 top
U10  M18_  [1X18]  10.67,63.5 270 top
U11  1.8V Reg  [SC70]  97.54,38.1 270 top
U12  LM1117  [SOT223]  84.84,30.48 0 top
U13  USD-SOCKET  [MICROSD_1:1]  101.35,56.52 0 top
U14  MUX-74HC4067SMD  [SSOP24]  83.57,48.26 0 top
U15  M18_  [1X18]  67.06,63.5 270 top
U16  M18_  [1X18]  69.6,63.5 270 top
U17  CY8C29466  [SOIC-28]  41.15,118.11 180 top
U18  VS1063  [LQFP-48]  47.5,100.33 180 top
U19  1.8V Reg  [SC70]  38.61,107.95 270 top
U20  LM1117  [SOT223]  25.91,100.33 0 top
U21  USD-SOCKET  [MICROSD_1:1]  42.42,126.36 0 top
U22  MUX-74HC4067SMD  [SSOP24]  24.64,118.11 0 top
U23  M18_  [1X18]  8.13,133.35 270 top
U24  M18_  [1X18]  10.67,133.35 270 top
U25  CY8C29466  [SOIC-28]  100.08,118.11 180 top
U26  VS1063  [LQFP-48]  106.43,100.33 180 top
U27  1.8V Reg  [SC70]  97.54,107.95 270 top
U28  LM1117  [SOT223]  84.84,100.33 0 top
U29  USD-SOCKET  [MICROSD_1:1]  101.35,126.36 0 top
U30  MUX-74HC4067SMD  [SSOP24]  83.57,118.11 0 top
U31  M18_  [1X18]  67.06,133.35 270 top
U32  M18_  [1X18]  69.6,133.35 270 top
U33  CY8C29466  [SOIC-28]  41.15,187.96 180 top
U34  VS1063  [LQFP-48]  47.5,170.18 180 top
U35  1.8V Reg  [SC70]  38.61,177.8 270 top
U36  LM1117  [SOT223]  25.91,170.18 0 top
U37  USD-SOCKET  [MICROSD_1:1]  42.42,196.22 0 top
U38  MUX-74HC4067SMD  [SSOP24]  24.64,187.96 0 top
U39  M18_  [1X18]  8.13,203.2 270 top
U40  M18_  [1X18]  10.67,203.2 270 top
U41  CY8C29466  [SOIC-28]  100.08,187.96 180 top
U42  VS1063  [LQFP-48]  106.43,170.18 180 top
U43  1.8V Reg  [SC70]  97.54,177.8 270 top
U44  LM1117  [SOT223]  84.84,170.18 0 top
U45  USD-SOCKET  [MICROSD_1:1]  101.35,196.22 0 top
U46  MUX-74HC4067SMD  [SSOP24]  83.57,187.96 0 top
U47  M18_  [1X18]  67.06,203.2 270 top
U48  M18_  [1X18]  69.6,203.2 270 top
U49  CY8C29466  [SOIC-28]  41.15,257.81 180 top
U50  VS1063  [LQFP-48]  47.5,240.03 180 top
U51  1.8V Reg  [SC70]  38.61,247.65 270 top
U52  LM1117  [SOT223]  25.91,240.03 0 top
U53  USD-SOCKET  [MICROSD_1:1]  42.42,266.06 0 top
U54  MUX-74HC4067SMD  [SSOP24]  24.64,257.81 0 top
U55  M18_  [1X18]  8.13,273.05 270 top
U56  M18_  [1X18]  10.67,273.05 270 top
U57  CY8C29466  [SOIC-28]  100.08,257.81 180 top
U58  VS1063  [LQFP-48]  106.43,240.03 180 top
U59  1.8V Reg  [SC70]  97.54,247.65 270 top
U60  LM1117  [SOT223]  84.84,240.03 0 top
U61  USD-SOCKET  [MICROSD_1:1]  101.35,266.06 0 top
U62  MUX-74HC4067SMD  [SSOP24]  83.57,257.81 0 top
U63  M18_  [1X18]  67.06,273.05 270 top
U64  M18_  [1X18]  69.6,273.05 270 top
U$1  SFE_LOGO_NAME_FLAME.2_INCH  [SFE_LOGO_NAME_FLAME_.2]  47.24,59.26 0 bottom
U$2  SFE_LOGO_NAME_FLAME.2_INCH  [SFE_LOGO_NAME_FLAME_.2]  106.17,59.26 0 bottom
U$3  STAND-OFF  [STAND-OFF]  121.67,12.7 0 top
U$4  STAND-OFF  [STAND-OFF]  68.33,12.7 0 top
U$5  STAND-OFF  [STAND-OFF]  68.33,69.85 0 top
U$6  STAND-OFF  [STAND-OFF]  121.67,69.85 0 top
U$7  SFE_LOGO_NAME_FLAME.2_INCH  [SFE_LOGO_NAME_FLAME_.2]  47.24,129.11 0 bottom
U$8  STAND-OFF  [STAND-OFF]  62.74,82.55 0 top
U$9  STAND-OFF  [STAND-OFF]  9.4,82.55 0 top
U$10  STAND-OFF  [STAND-OFF]  9.4,139.7 0 top
U$11  STAND-OFF  [STAND-OFF]  62.74,139.7 0 top
U$12  STAND-OFF  [STAND-OFF]  62.74,12.7 0 top
U$13  STAND-OFF  [STAND-OFF]  9.4,12.7 0 top
U$14  STAND-OFF  [STAND-OFF]  9.4,69.85 0 top
U$15  STAND-OFF  [STAND-OFF]  62.74,69.85 0 top
U$16  SFE_LOGO_NAME_FLAME.2_INCH  [SFE_LOGO_NAME_FLAME_.2]  106.17,129.11 0 bottom
U$17  STAND-OFF  [STAND-OFF]  121.67,82.55 0 top
U$18  STAND-OFF  [STAND-OFF]  68.33,82.55 0 top
U$19  STAND-OFF  [STAND-OFF]  68.33,139.7 0 top
U$20  STAND-OFF  [STAND-OFF]  121.67,139.7 0 top
U$21  SFE_LOGO_NAME_FLAME.2_INCH  [SFE_LOGO_NAME_FLAME_.2]  47.24,198.96 0 bottom
U$22  STAND-OFF  [STAND-OFF]  62.74,152.4 0 top
U$23  STAND-OFF  [STAND-OFF]  9.4,152.4 0 top
U$24  STAND-OFF  [STAND-OFF]  9.4,209.55 0 top
U$25  STAND-OFF  [STAND-OFF]  62.74,209.55 0 top
U$26  SFE_LOGO_NAME_FLAME.2_INCH  [SFE_LOGO_NAME_FLAME_.2]  106.17,198.96 0 bottom
U$27  STAND-OFF  [STAND-OFF]  121.67,152.4 0 top
U$28  STAND-OFF  [STAND-OFF]  68.33,152.4 0 top
U$29  STAND-OFF  [STAND-OFF]  68.33,209.55 0 top
U$30  STAND-OFF  [STAND-OFF]  121.67,209.55 0 top
U$31  SFE_LOGO_NAME_FLAME.2_INCH  [SFE_LOGO_NAME_FLAME_.2]  47.24,268.81 0 bottom
U$32  STAND-OFF  [STAND-OFF]  62.74,222.25 0 top
U$33  STAND-OFF  [STAND-OFF]  9.4,222.25 0 top
U$34  STAND-OFF  [STAND-OFF]  9.4,279.4 0 top
U$35  STAND-OFF  [STAND-OFF]  62.74,279.4 0 top
U$36  SFE_LOGO_NAME_FLAME.2_INCH  [SFE_LOGO_NAME_FLAME_.2]  106.17,268.81 0 bottom
U$37  STAND-OFF  [STAND-OFF]  121.67,222.25 0 top
U$38  STAND-OFF  [STAND-OFF]  68.33,222.25 0 top
U$39  STAND-OFF  [STAND-OFF]  68.33,279.4 0 top
U$40  STAND-OFF  [STAND-OFF]  121.67,279.4 0 top

## Library data of the parts
C1 C2 C4 C6 C8 C11 C17 C20 C23 C28-C30 C33 C36 C39 C44-C46 C49 C52 C55 C60-C62 C65 C68 C71 C76-C78 C81 C84 C87 C92-C94 C97 C100 C103 C108-C110 C113 C116 C119 C124-C126 = SparkFun-Capacitors; PROD_ID: CAP-00810
C3 C5 C7 C18 C19 C27 C34 C35 C43 C50 C51 C59 C66 C67 C75 C82 C83 C91 C98 C99 C107 C114 C115 C123 = SparkFun-Capacitors; PROD_ID: CAP-00811
C9 C10 C21 C22 C37 C38 C53 C54 C69 C70 C85 C86 C101 C102 C117 C118 = SparkFun-Capacitors; PROD_ID: CAP-07876
C12 C14 C24 C26 C40 C42 C56 C58 C72 C74 C88 C90 C104 C106 C120 C122 = SparkFun-Capacitors; PROD_ID: CAP-00867
C13 C25 C41 C57 C73 C89 C105 C121 = SparkFun-Capacitors; PROD_ID: CAP-08605
C15 C16 C31 C32 C47 C48 C63 C64 C79 C80 C95 C96 C111 C112 C127 C128 = SparkFun-Capacitors; PROD_ID: CAP-11015
E$1 = SparkFun-Retired
E$5 E$6 JP6 JP7 JP11 JP12 JP17 JP18 JP23 JP24 JP29 JP30 JP35 JP36 JP41 JP42 JP47 JP48 LOGO1-LOGO16 U$1 U$2 U$7 U$16 U$21 U$26 U$31 U$36 = SparkFun-Aesthetics
F1-F8 = SparkFun-PowerIC; PROD_ID: RES-08585
J1-J8 = SparkFun-Connectors; PROD_ID: CONN-08106; SF_ID: PRT-12748
JP1 JP3 JP5 JP8-JP10 JP13 JP15 JP16 JP19 JP21 JP22 JP25 JP27 JP28 JP31 JP33 JP34 JP37 JP39 JP40 JP43 JP45 JP46 U9 U10 U15 U16 U23 U24 U31 U32 U39 U40 U47 U48 U55 U56 U63 U64 = SparkFun
JP2 JP4 JP14 JP20 JP26 JP32 JP38 JP44 = SparkFun-Connectors; PROD_ID: CONN-10353
LED1 LED3 LED5 LED7 LED9 LED11 LED13 LED15 = SparkFun-LED; PROD_ID: DIO-00809
LED2 LED4 LED6 LED8 LED10 LED12 LED14 LED16 = SparkFun-LED; PROD_ID: DIO-00862
Q1-Q8 = SparkFun-FreqCtrl; PROD_ID: XTAL-09653
R1 R12 R41 R74 R80 R113 R119 R152 R158 R191 R197 R230 R236 R269 R275 R308 = SparkFun-Resistors; PROD_ID: RES-07856
R2 R40 R79 R118 R157 R196 R235 R274 = SparkFun-Resistors; PROD_ID: RES-00818
R3 R42 R81 R120 R159 R198 R237 R276 = SparkFun-Resistors; PROD_ID: RES-07868
R4 R7 R8 R14 R15 R43 R47 R48 R54 R55 R82 R86 R87 R93 R94 R121 R125 R126 R132 R133 R160 R164 R165 R171 R172 R199 R203 R204 R210 R211 R238 R242 R243 R249 R250 R277 R281 R282 R288 R289 = SparkFun-Resistors; PROD_ID: RES-07828
R5 R49 R88 R127 R166 R205 R244 R283 = SparkFun-Resistors; PROD_ID: RES-07871
R6 R50 R89 R128 R167 R206 R245 R284 = SparkFun-Resistors; PROD_ID: RES-07849
R9-R11 R44-R46 R83-R85 R122-R124 R161-R163 R200-R202 R239-R241 R278-R280 = SparkFun-Resistors; PROD_ID: RES-07862
R13 R39 R75 R78 R114 R117 R153 R156 R192 R195 R231 R234 R270 R273 R309 R312 = SparkFun-Resistors; PROD_ID: RES-12438
R16 R18 R19 R52 R76 R77 R91 R115 R116 R130 R154 R155 R169 R193 R194 R208 R232 R233 R247 R271 R272 R286 R310 R311 = SparkFun-Resistors; PROD_ID: RES-00824
R17 R51 R90 R129 R168 R207 R246 R285 = SparkFun-Resistors; PROD_ID: RES-07864
R20-R38 R53 R56-R73 R92 R95-R112 R131 R134-R151 R170 R173-R190 R209 R212-R229 R248 R251-R268 R287 R290-R307 = SparkFun-Resistors; PROD_ID: RES-07863
S1 S3 S5 S7 S9 S11 S13 S15 = SparkFun-Electromechanical; PROD_ID: SWCH-08301
S2 S4 S6 S8 S10 S12 S14 S16 = SparkFun-Electromechanical; PROD_ID: SWCH-08179
SJ1-SJ32 = SparkFun-Passives
U1 U6 U17 U25 U33 U41 U49 U57 = SparkFun-DigitalIC; PROD_ID: IC-08972
U2 U13 U21 U29 U37 U45 U53 U61 = SparkFun-Connectors; PROD_ID: CONN-07820
U3 U14 U22 U30 U38 U46 U54 U62 = SparkFun-AnalogIC; PROD_ID: IC-08252
U4 U12 U20 U28 U36 U44 U52 U60 = SparkFun-PowerIC; PROD_ID: VREG-08170
U5 U11 U19 U27 U35 U43 U51 U59 = SparkFun-PowerIC; PROD_ID: VREG-08428
U7 U8 U18 U26 U34 U42 U50 U58 = SparkFun-DigitalIC; PROD_ID: IC-10870
U$3-U$6 U$8-U$15 U$17-U$20 U$22-U$25 U$27-U$30 U$32-U$35 U$37-U$40 = SparkFun-Electromechanical